# Altium PCB M2.PcbDoc
Units mil, origin at the board's own origin, x right, y up, seen from the top; angles counter-clockwise.
Board outline 3696.69 x 2256.1 mil, 2 copper layers (Top Layer, Bottom Layer); 10 components, 67 nets, 177 pads, 72 vias.
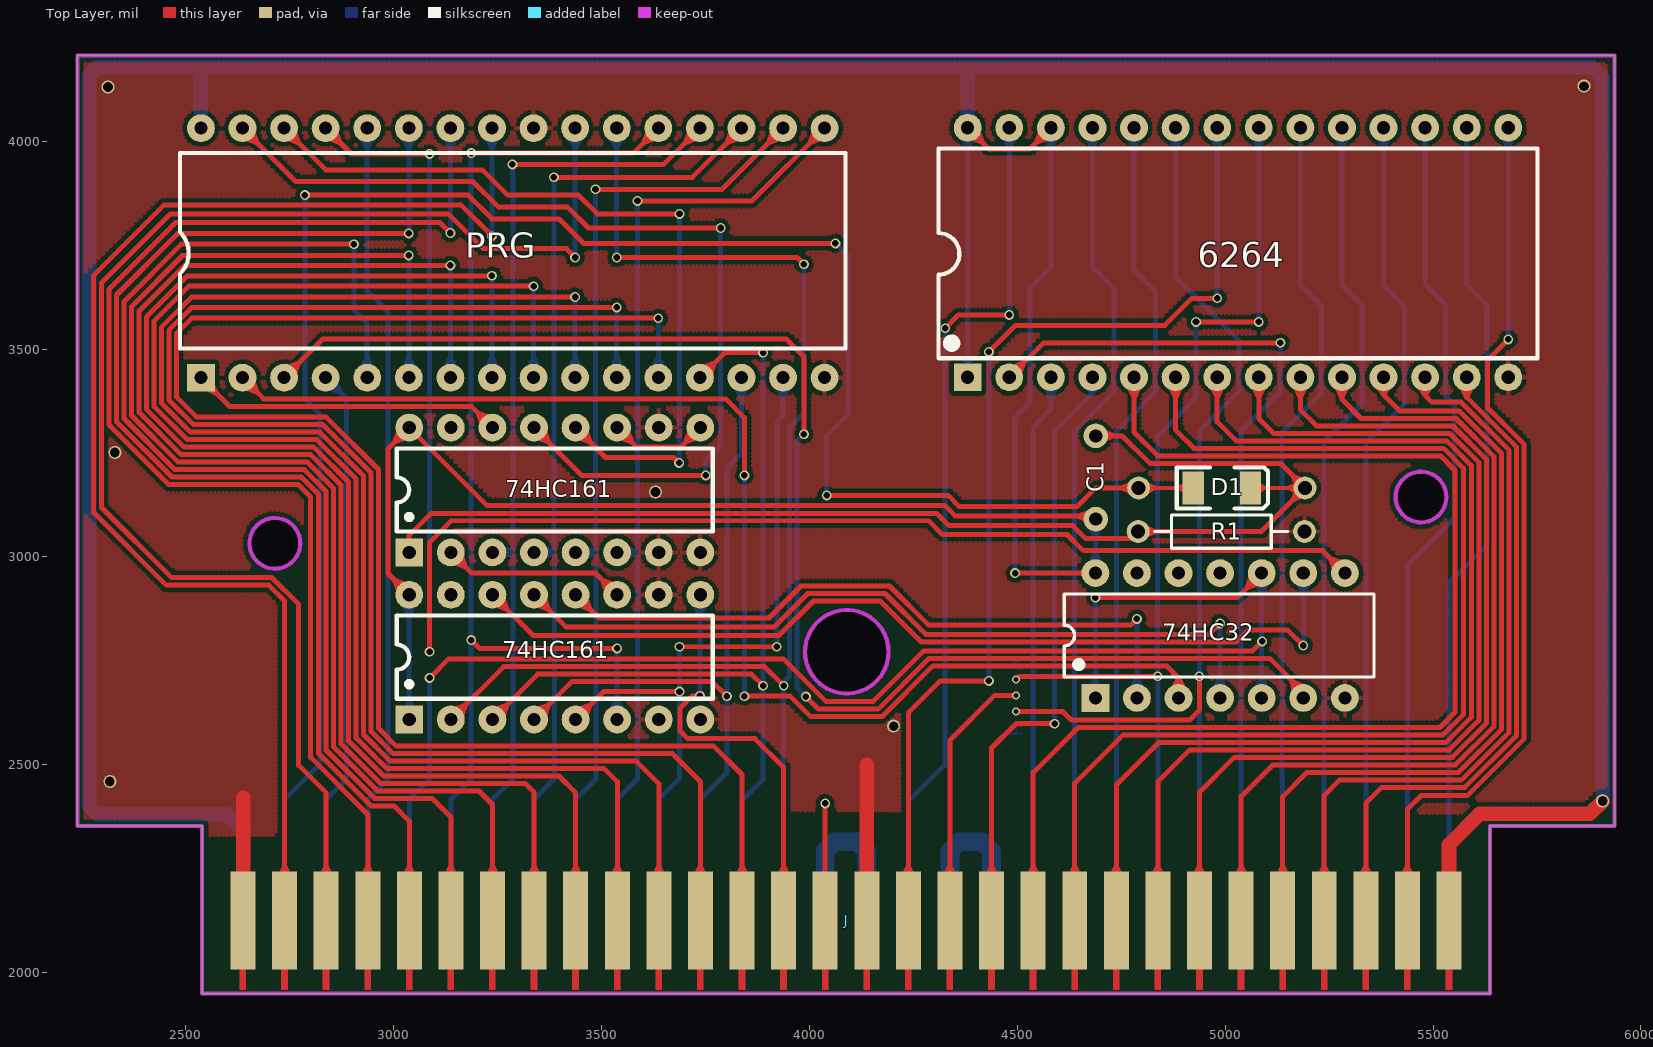
[diagram p0: Top Layer view]
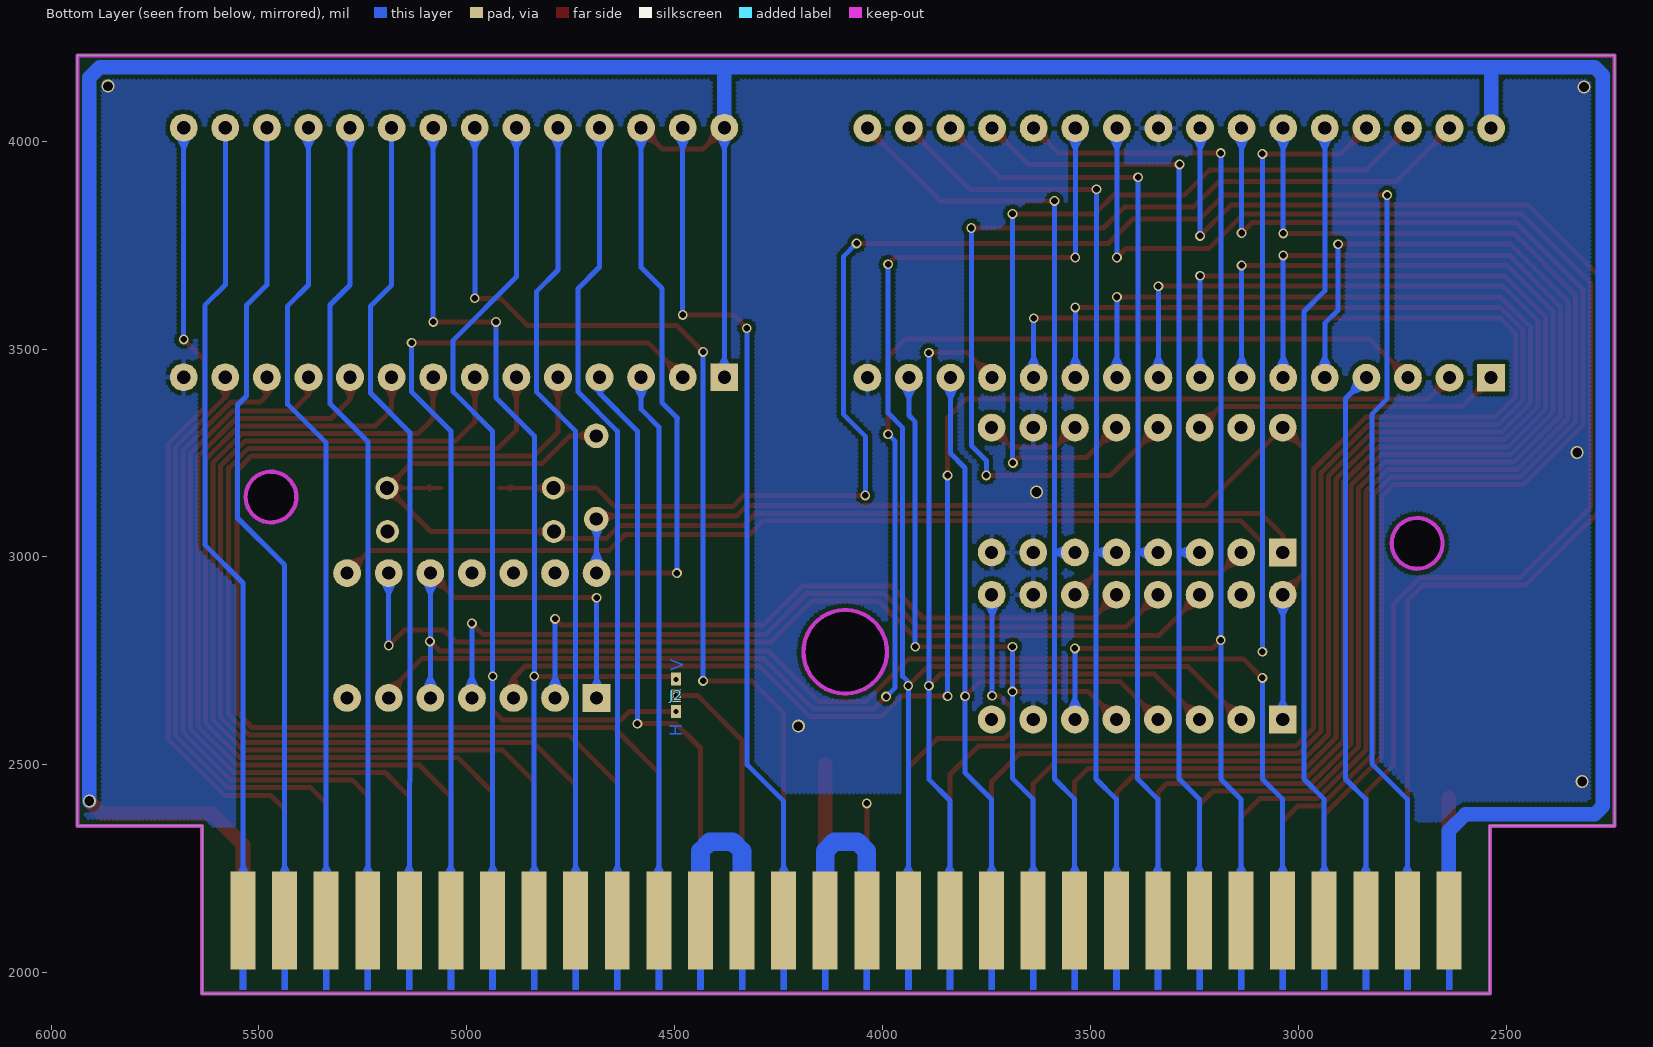
[diagram p1: Bottom Layer view, seen from below]
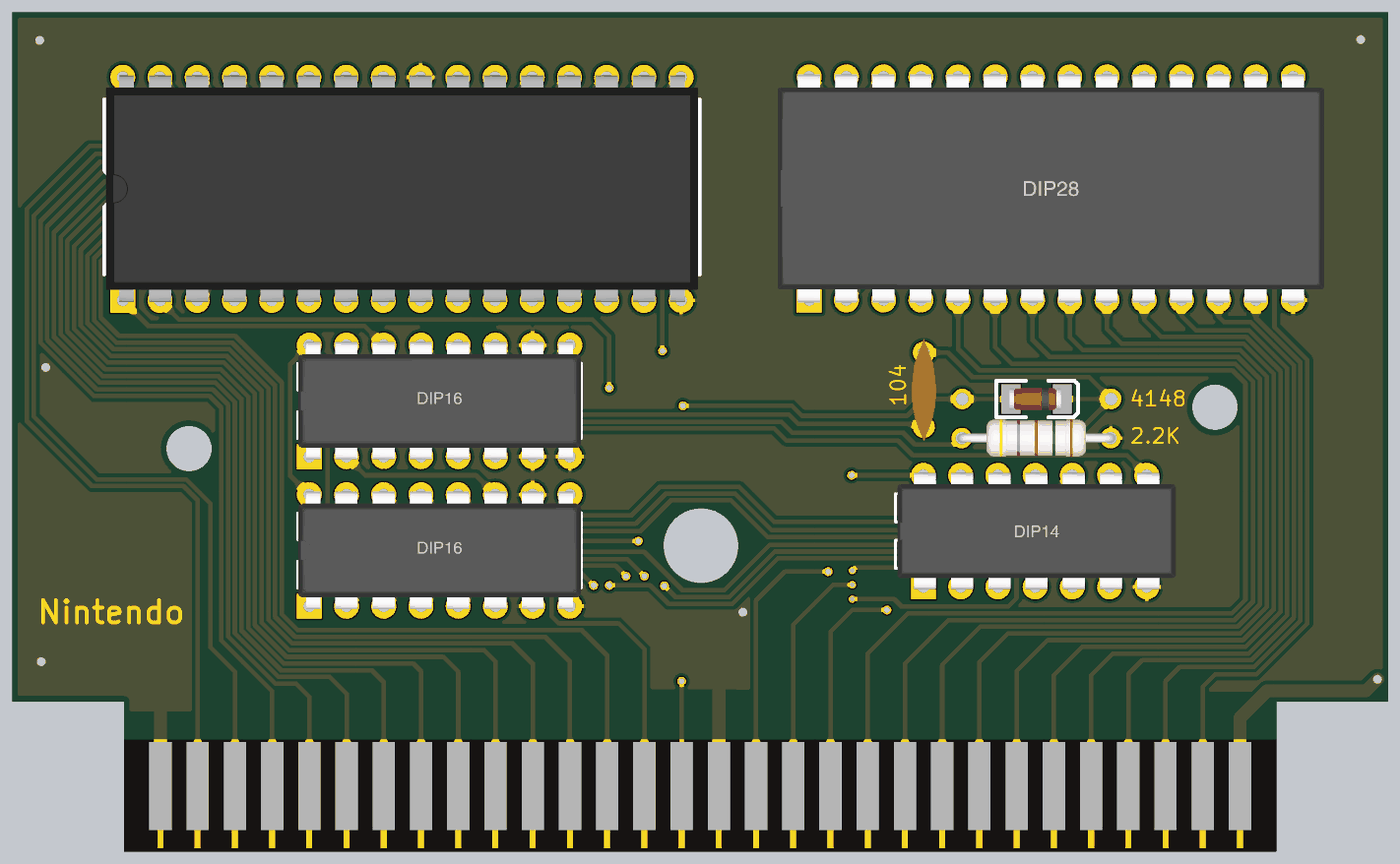
[diagram p2: 3D render of the assembled board from above, using the file's embedded part models]

## Layer stack, top to bottom
Top Solder: solder mask 0.4, Solder Resist, Dk 3.5
Top Layer: signal copper 1.4
Dielectric 1: dielectric 12.6, FR-4, Dk 4.8
Bottom Layer: signal copper 1.4
Bottom Solder: solder mask 0.4, Solder Resist, Dk 3.5

## Board outline
2540,1950 2540,2352.95 2240,2352.95 2240,4206.1 5936.69,4206.1 5936.69,2352.95 5636.69,2352.95 5636.69,1950
cut-out: 2715,2971.65 cw(c2715,3032.68) 2653.98,3032.68 cw(c2715,3032.68) 2715,3093.7 cw(c2715,3032.68) 2776.02,3032.68 cw(c2715,3032.68)
cut-out: 3989.84,2771.81 ccw(c4090.24,2771.81) 4090.24,2671.42 ccw(c4090.24,2771.81) 4190.63,2771.81 ccw(c4090.24,2771.81) 4090.24,2872.2 ccw(c4090.24,2771.81)
cut-out: 5410.04,3144.02 ccw(c5471.06,3144.02) 5471.06,3082.99 ccw(c5471.06,3144.02) 5532.09,3144.02 ccw(c5471.06,3144.02) 5471.06,3205.04 ccw(c5471.06,3144.02)

## Design rules (kind name [scope] priority, off if disabled: settings)
Clearance [All] p1: gap=6 ignorepadtopadclearanceinfootprint=FALSE except(10: Arc-Poly Track-Poly SMDPad-Poly THPad-Poly Via-Poly Fill-Poly Poly-Poly)
HoleSize [All] p1: absolutevalues=TRUE maxlimit=196.85 minlimit=1 maxpercent=80.000 minpercent=20.000
HoleToHoleClearance [All] p1: gap=1 allowstackedmicrovias=TRUE
MinimumSolderMaskSliver [All] p1: minsoldermaskwidth=1
PolygonConnect PolygonConnect_1 [IsPad] p1: connectstyle=Relief reliefconductorwidth=10 reliefentries=4 polygonreliefangle="90 Angle" airgapwidth=10
PolygonConnect [All] p2: connectstyle=Direct reliefconductorwidth=10 reliefentries=4 polygonreliefangle="90 Angle" airgapwidth=10
RoutingVias [All] p1: holewidth=15.75 width=23.62 viastyle="Through Hole" minholewidth=11.81 minwidth=19.68 maxholewidth=196.85 maxwidth=216.54
SilkToSilkClearance [All] p1: silktosilkclearance=0
SilkToSolderMaskClearance [IsPad] p1: minsilkscreentomaskgap=0 clearancetoexposedcopper=TRUE
SolderMaskExpansion [All] p1: expansion=4
Width [All] p1: maxlimit=80 minlimit=6 preferedwidth=12
25 further rules are at their usual default settings.

## Classes and differential pairs
component class M2HK: 74HC32 74HC161 6264 C1 D1 J PRG R1

## Components (designator, comment, footprint, x,y, rotation, side; value= is the part's Value field where it differs from the comment)
74HC32 "74HC32" DIP14 4988,2811 r90 top locked (schematic designator U3)
74HC161 "74LS161" DIP16 3388,2759 r90 top locked (schematic designator U4)
74HC161 "74LS161" DIP16 3388,3161 r90 top locked (schematic designator U5)
6264 "HM6264ALP-10" DIP28L 5031,3732 r90 top locked (schematic designator U2)
C1 "104" RAD-0.2 4689,3291 r270 top
D1 "4148" 4148 4923.2,3166 r0 top
J "60P" 60P-3(J)(L) 4088.38,2126 r0 top locked
J2 "3孔" 跳孔 4497,2722.12 r270 bottom
PRG "27C801" DIP32 3287,3731 r90 top locked (schematic designator U6)
R1 "2.2K" AXIAL0.4 4661,3021 r0 top

## Footprints (in the part's own frame and the unit in brackets; to place one, negate y for a bottom-side part, rotate by r counter-clockwise, add the part's x,y. Pads: shape width x height; smd on the part's side, far side on the other; paste and mask are expansions set on the pad)
60P-3(J)(L) [mil]
  rect 60x236.22 smd: 1(-1450,0) 2(-1350,0) 3(-1250,0) 4(-1150,0) 5(-1050,0) 6(-950,0) 7(-850,0) 8(-750,0) 9(-650,0) 10(-550,0) 11(-450,0) 12(-350,0) 13(-250,0) 14(-150,0) 15(-50,0) 16(50,0) 17(150,0) 18(250,0) 19(350,0) 20(450,0) 21(550,0) 22(650,0) 23(750,0) 24(850,0) 25(950,0) 26(1050,0) 27(1150,0) 28(1250,0) 29(1350,0) 30(1450,0)
  rect 60x236.22 smd far side: 31(-1450,0) 32(-1350,0) 33(-1250,0) 34(-1150,0) 35(-1050,0) 36(-950,0) 37(-850,0) 38(-750,0) 39(-650,0) 40(-550,0) 41(-450,0) 42(-350,0) 43(-250,0) 44(-150,0) 45(-50,0) 46(50,0) 47(150,0) 48(250,0) 49(350,0) 50(450,0) 51(550,0) 52(650,0) 53(750,0) 54(850,0) 55(950,0) 56(1050,0) 57(1150,0) 58(1250,0) 59(1350,0) 60(1450,0)
  Top Layer region: 1441.98,-166.91 1458.04,-166.91 1458.04,-101.91 1441.98,-101.91
  Top Layer region: 1341.98,-166.91 1358.04,-166.91 1358.04,-101.91 1341.98,-101.91
  Top Layer region: 1241.94,-166.91 1258,-166.91 1258,-101.91 1241.94,-101.91
  Top Layer region: 1141.94,-166.91 1158,-166.91 1158,-101.91 1141.94,-101.91
  Top Layer region: 1041.9,-166.91 1057.96,-166.91 1057.96,-101.91 1041.9,-101.91
  Top Layer region: 941.9,-166.91 957.96,-166.91 957.96,-101.91 941.9,-101.91
  Top Layer region: 841.9,-166.91 857.96,-166.91 857.96,-101.91 841.9,-101.91
  Top Layer region: 741.86,-166.91 757.92,-166.91 757.92,-101.91 741.86,-101.91
  Top Layer region: 641.86,-166.91 657.92,-166.91 657.92,-101.91 641.86,-101.91
  Top Layer region: 541.82,-166.91 557.88,-166.91 557.88,-101.91 541.82,-101.91
  Top Layer region: 441.82,-166.91 457.88,-166.91 457.88,-101.91 441.82,-101.91
  Top Layer region: 341.82,-166.91 357.88,-166.91 357.88,-101.91 341.82,-101.91
  Top Layer region: 241.78,-166.91 257.84,-166.91 257.84,-101.91 241.78,-101.91
  Top Layer region: 141.78,-166.91 157.84,-166.91 157.84,-101.91 141.78,-101.91
  Top Layer region: 41.74,-166.91 57.8,-166.91 57.8,-101.91 41.74,-101.91
  Top Layer region: -58.26,-166.91 -42.2,-166.91 -42.2,-101.91 -58.26,-101.91
  Top Layer region: -158.26,-166.91 -142.2,-166.91 -142.2,-101.91 -158.26,-101.91
  Top Layer region: -258.3,-166.91 -242.24,-166.91 -242.24,-101.91 -258.3,-101.91
  Top Layer region: -358.3,-166.91 -342.24,-166.91 -342.24,-101.91 -358.3,-101.91
  Top Layer region: -458.34,-166.91 -442.28,-166.91 -442.28,-101.91 -458.34,-101.91
  Top Layer region: -558.34,-166.91 -542.28,-166.91 -542.28,-101.91 -558.34,-101.91
  Top Layer region: -658.38,-166.91 -642.32,-166.91 -642.32,-101.91 -658.38,-101.91
  Top Layer region: -758.38,-166.91 -742.32,-166.91 -742.32,-101.91 -758.38,-101.91
  Top Layer region: -858.38,-166.91 -842.32,-166.91 -842.32,-101.91 -858.38,-101.91
  Top Layer region: -958.42,-166.91 -942.35,-166.91 -942.35,-101.91 -958.42,-101.91
  Top Layer region: -1058.42,-166.91 -1042.35,-166.91 -1042.35,-101.91 -1058.42,-101.91
  Top Layer region: -1158.46,-166.91 -1142.39,-166.91 -1142.39,-101.91 -1158.46,-101.91
  Top Layer region: -1258.46,-166.91 -1242.39,-166.91 -1242.39,-101.91 -1258.46,-101.91
  Top Layer region: -1358.46,-166.91 -1342.39,-166.91 -1342.39,-101.91 -1358.46,-101.91
  Top Layer region: -1458.5,-166.91 -1442.43,-166.91 -1442.43,-101.91 -1458.5,-101.91
  Bottom Layer region: -1458.5,-166.91 -1442.43,-166.91 -1442.43,-101.91 -1458.5,-101.91
  Bottom Layer region: -1358.46,-166.91 -1342.39,-166.91 -1342.39,-101.91 -1358.46,-101.91
  Bottom Layer region: -1258.46,-166.91 -1242.39,-166.91 -1242.39,-101.91 -1258.46,-101.91
  Bottom Layer region: -1158.46,-166.91 -1142.39,-166.91 -1142.39,-101.91 -1158.46,-101.91
  Bottom Layer region: -1058.42,-166.91 -1042.35,-166.91 -1042.35,-101.91 -1058.42,-101.91
  Bottom Layer region: -958.42,-166.91 -942.35,-166.91 -942.35,-101.91 -958.42,-101.91
  Bottom Layer region: -858.38,-166.91 -842.32,-166.91 -842.32,-101.91 -858.38,-101.91
  Bottom Layer region: -758.38,-166.91 -742.32,-166.91 -742.32,-101.91 -758.38,-101.91
  Bottom Layer region: -658.38,-166.91 -642.32,-166.91 -642.32,-101.91 -658.38,-101.91
  Bottom Layer region: -558.34,-166.91 -542.28,-166.91 -542.28,-101.91 -558.34,-101.91
  Bottom Layer region: -458.34,-166.91 -442.28,-166.91 -442.28,-101.91 -458.34,-101.91
  Bottom Layer region: -358.3,-166.91 -342.24,-166.91 -342.24,-101.91 -358.3,-101.91
  Bottom Layer region: -258.3,-166.91 -242.24,-166.91 -242.24,-101.91 -258.3,-101.91
  Bottom Layer region: -158.26,-166.91 -142.2,-166.91 -142.2,-101.91 -158.26,-101.91
  Bottom Layer region: -58.26,-166.91 -42.2,-166.91 -42.2,-101.91 -58.26,-101.91
  Bottom Layer region: 41.74,-166.91 57.8,-166.91 57.8,-101.91 41.74,-101.91
  Bottom Layer region: 141.78,-166.91 157.84,-166.91 157.84,-101.91 141.78,-101.91
  Bottom Layer region: 241.78,-166.91 257.84,-166.91 257.84,-101.91 241.78,-101.91
  Bottom Layer region: 341.82,-166.91 357.88,-166.91 357.88,-101.91 341.82,-101.91
  Bottom Layer region: 441.82,-166.91 457.88,-166.91 457.88,-101.91 441.82,-101.91
  Bottom Layer region: 541.82,-166.91 557.88,-166.91 557.88,-101.91 541.82,-101.91
  Bottom Layer region: 641.86,-166.91 657.92,-166.91 657.92,-101.91 641.86,-101.91
  Bottom Layer region: 741.86,-166.91 757.92,-166.91 757.92,-101.91 741.86,-101.91
  Bottom Layer region: 841.9,-166.91 857.96,-166.91 857.96,-101.91 841.9,-101.91
  Bottom Layer region: 941.9,-166.91 957.96,-166.91 957.96,-101.91 941.9,-101.91
  Bottom Layer region: 1041.9,-166.91 1057.96,-166.91 1057.96,-101.91 1041.9,-101.91
  Bottom Layer region: 1141.94,-166.91 1158,-166.91 1158,-101.91 1141.94,-101.91
  Bottom Layer region: 1241.94,-166.91 1258,-166.91 1258,-101.91 1241.94,-101.91
  Bottom Layer region: 1341.98,-166.91 1358.04,-166.91 1358.04,-101.91 1341.98,-101.91
  Bottom Layer region: 1441.98,-166.91 1458.04,-166.91 1458.04,-101.91 1441.98,-101.91
4148 [mm]
  round 1.4 hole 0.85: A(-3.329,0) K(6.831,0)
  rect 1.3x2 smd: A(0,0) K(3.5,0)
  Top Layer lines w0.254: -3.329,0 0,0 ; 3.5,0 6.831,0
  silkscreen extent -1,-1.25 4.57,1.25, body extent -0.1,-0.75 3.4,0.75, height 1.5
AXIAL0.4 [mm] "1/4W/1/2W"
  round 1.4 hole 0.85: 1(3.302,1.016) 2(13.462,1.016)
  silkscreen extent 4.32,0 12.45,2.03, body extent 3,-0.24 13.76,2.28, height 2.63
DIP14 [mm]
  rect 1.7x1.7 hole 0.8: 1(-3.81,7.62)
  round 1.7 hole 0.8: 2(-3.81,5.08) 3(-3.81,2.54) 4(-3.81,0) 5(-3.81,-2.54) 6(-3.81,-5.08) 7(-3.81,-7.62) 8(3.81,-7.62) 9(3.81,-5.08) 10(3.81,-2.54) 11(3.81,0) 12(3.81,2.54) 13(3.81,5.08) 14(3.81,7.62)
  silkscreen extent -2.54,-9.4 2.54,9.53, body extent -3.98,-9.6 3.98,9.4, height 4.1
DIP16 [mm]
  rect 1.7x1.7 hole 0.8: 1(-3.81,8.89)
  round 1.7 hole 0.8: 2(-3.81,6.35) 3(-3.81,3.81) 4(-3.81,1.27) 5(-3.81,-1.27) 6(-3.81,-3.81) 7(-3.81,-6.35) 8(-3.81,-8.89) 9(3.81,-8.89) 10(3.81,-6.35) 11(3.81,-3.81) 12(3.81,-1.27) 13(3.81,1.27) 14(3.81,3.81) 15(3.81,6.35) 16(3.81,8.89)
  silkscreen extent -2.54,-9.65 2.54,9.65, body extent -4.02,-9.65 4.02,9.65, height 4.45
DIP28L [mm]
  rect 1.7x1.7 hole 0.8: 1(-7.62,16.51)
  round 1.7 hole 0.8: 2(-7.62,13.97) 3(-7.62,11.43) 4(-7.62,8.89) 5(-7.62,6.35) 6(-7.62,3.81) 7(-7.62,1.27) 8(-7.62,-1.27) 9(-7.62,-3.81) 10(-7.62,-6.35) 11(-7.62,-8.89) 12(-7.62,-11.43) 13(-7.62,-13.97) 14(-7.62,-16.51) 15(7.62,-16.51) 16(7.62,-13.97) 17(7.62,-11.43) 18(7.62,-8.89) 19(7.62,-6.35) 20(7.62,-3.81) 21(7.62,-1.27) 22(7.62,1.27) 23(7.62,3.81) 24(7.62,6.35) 25(7.62,8.89) 26(7.62,11.43) 27(7.62,13.97) 28(7.62,16.51)
  silkscreen extent -6.46,-18.29 6.35,18.29, body extent -7.78,-18.63 7.78,18.67, height 4.7
DIP32 [mm]
  rect 1.7x1.7 hole 0.8: 1(-7.62,19.05)
  round 1.7 hole 0.8: 2(-7.62,16.51) 3(-7.62,13.97) 4(-7.62,11.43) 5(-7.62,8.89) 6(-7.62,6.35) 7(-7.62,3.81) 8(-7.62,1.27) 9(-7.62,-1.27) 10(-7.62,-3.81) 11(-7.62,-6.35) 12(-7.62,-8.89) 13(-7.62,-11.43) 14(-7.62,-13.97) 15(-7.62,-16.51) 16(-7.62,-19.05) 17(7.62,-19.05) 18(7.62,-16.51) 19(7.62,-13.97) 20(7.62,-11.43) 21(7.62,-8.89) 22(7.62,-6.35) 23(7.62,-3.81) 24(7.62,-1.27) 25(7.62,1.27) 26(7.62,3.81) 27(7.62,6.35) 28(7.62,8.89) 29(7.62,11.43) 30(7.62,13.97) 31(7.62,16.51) 32(7.62,19.05)
  silkscreen extent -5.84,-20.32 6.1,20.32, body extent -7.75,-20.21 7.75,20.19, height 5
RAD-0.2 [mm]
  round 1.5 hole 0.8: 1(0,0) 2(5.08,0)
  body extent -0.96,-0.85 6.04,0.85, height 7.06
跳孔 [mm]
  rect 0.8x0.6 smd: 1(1.4,0) 2(2.391,0) 3(0.409,0)

## Part data
74HC32: "四路2输入或门"
74HC161 74HC161: "BCD十进制计数器/ 4位二进制计数器"
6264: "8192字×8位高速CMOS静态RAM"
C1: library part CAP, "无极性电容"
D1: library part 1N4148
J2: library part 跳孔
PRG: "8兆位1M ×8紫外线可擦除CMOS EPROM"
R1: library part RES

## Via types
v1: diameter 23.62, hole 15.75, Top Layer to Bottom Layer, 62 vias
v2: diameter 31.5, hole 23.62, Top Layer to Bottom Layer, tented both sides, 7 vias
v3: diameter 19.68, hole 11.81, Top Layer to Bottom Layer, 3 vias

## Nets (pads, with @x,y where several pads share a name; then routed paths per layer and width w, separated by ;. In a path a pad name is that pad's centre, name@x,y a point inside that pad or via, vN(x,y) a via of type N, cw(c..) or ccw(c..) an arc to the next point about the centre after c; other vN are vias at no path point)
"CON 14": 74HC161.9@3738,2909 J.14 | length 1011.4
  Top Layer w12: v1(3737,2666) 3719,2666 3689,2636 3689,2582 3708,2563 3869,2563 3938.38,2493.62 J.14
  Bottom Layer w12: v1(3737,2666) 3737,2908 74HC161.9@3738,2909
"CON 18": J2.1 J.18 | length 636.6
  Top Layer w12: J.18 4338.38,2559.38 4446,2667 v3(4497,2667)
GND: 74HC32.7 74HC161.7 74HC161.8 74HC161.10 6264.14 J.1 J.16 PRG.16 PRG.24 R1.2 | length 669.8
  Top Layer w35: J.1 2638.38,2421.38 ; J.16 4138.38,2500.38
  other v2: 2318,2460 4203,2593 3630,3156 2330,3251 2314,4130 5863,4132
M2: D1.A J.32 | length 4539.2
  Top Layer w12: v1(2787,3870) 3180,3870 3237,3813 3398,3813 3457,3754 v1(4063,3754) ; v1(4042,3148) 4334,3148 4361,3121 4644,3121 4689,3166 D1.A@4792.14,3166
  Bottom Layer w12: J.32 2738.38,2417.38 2824,2503 2824,3343 2787,3380 v1(2787,3870) ; v1(4042,3148) 4042,3290 4094,3342 4094,3723 v1(4063,3754)
NetC1_1: 74HC161.1@3038,3011 C1.1 D1.K R1.1 | length 2847.8
  Top Layer w12: 74HC161.1@3038,3011 3038,3052 3091,3105 4306,3105 4336,3075 4634,3075 4665,3044 4774,3044 R1.1 5087.14,3061 5192.14,3166 5133.14,3225 4819,3225 4753,3291 C1.1
NetJ_45: J.45 J.46 | length 430
  Bottom Layer w45: J.45@4038.38,2137 4038.38,2292.84 4060.53,2315 4116.22,2315 4138.38,2292.84 J.46@4138.38,2137
NetJ_48: J.48 J.49 | length 430
  Bottom Layer w45: J.48@4338.38,2137 4338.38,2292.84 4360.53,2315 4416.22,2315 4438.38,2292.84 J.49@4438.38,2137
NetU1_36: 74HC32.8 PRG.29 | length 4010.4
  Top Layer w12: PRG.29 2899,3969 v1(3087,3969) ; v1(3087,2772) 3087,3035 3139,3087 4287,3087 4320,3054 4620,3054 4659,3015 5234,3015 74HC32.8
  Bottom Layer w12: v1(3087,2772) v1(3087,3969)
NetU3_2: 74HC32.2 74HC161.12@3438,2909 | length 1640.2
  Top Layer w12: 74HC161.12@3438,2909 3494,2853 3903,2853 3980,2930 4193,2930 4287,2836 4773,2836 v1(4788,2851)
  Bottom Layer w12: 74HC32.2 v1(4788,2851)
NetU3_4: 74HC32.4 74HC161.13@3338,2909 | length 1947.1
  Top Layer w12: 74HC161.13@3338,2909 3416,2831 3915,2831 3996,2912 4182,2912 4281,2813 4961,2813 v1(4988,2840)
  Bottom Layer w12: 74HC32.4 v1(4988,2840)
NetU3_9: 74HC32.9 74HC161.14@3238,2909 | length 2280.3
  Top Layer w12: 74HC161.14@3238,2909 3336,2811 3927,2811 4010,2894 4171,2894 4270,2795 5026,2795 5055,2824 5151,2824 v1(5188,2787) ; 74HC32.9@5187,2956 74HC32.9@5187,2969
  Bottom Layer w12: v1(5188,2787) 74HC32.9
NetU4_11: 74HC161.2@3138,3011 74HC161.11@3538,2909 | length 442.2
  Top Layer w12: 74HC161.2@3138,3011 3188,2961 3486,2961 74HC161.11@3538,2909
NetU5_9: 74HC161.9@3738,3311 74HC161.11@3538,3311 | length 238.9
  Top Layer w12: 74HC161.11@3538,3311 3585,3264 3691,3264 74HC161.9@3738,3311
"PRG A0": J.13 PRG.12 | length 3921.2
  Top Layer w12: v1(3637,3574) 2514.73,3574 2478,3537.27 2478,3385 2527,3336 2838.1,3336 2964,3210.1 2964,2588 3007,2545 3770,2545 3838.38,2476.62 J.13
  Bottom Layer w12: PRG.12 v1(3637,3574)
"PRG A1": J.12 PRG.11 | length 3792.8
  Top Layer w12: v1(3537,3600) 2515.19,3600 2460,3544.81 2460,3377.54 2519.54,3318 2830.65,3318 2946,3202.65 2946,2580.54 2999.54,2527 3671,2527 3738.38,2459.62 J.12
  Bottom Layer w12: PRG.11 v1(3537,3600)
"PRG A2": J.11 PRG.10 | length 3670
  Top Layer w12: v1(3437,3625) 2514.73,3625 2442,3552.27 2442,3370.09 2512.09,3300 2823.19,3300 2928,3195.19 2928,2573 2992,2509 3584,2509 3638.38,2454.62 J.11
  Bottom Layer w12: PRG.10 v1(3437,3625)
"PRG A3": J.10 PRG.9 | length 3558.7
  Top Layer w12: v1(3337,3651) 2508,3651 2424,3567 2424,3362.63 2504.63,3282 2815.73,3282 2910,3187.73 2910,2565.54 2984.54,2491 3507,2491 3538.38,2459.62 J.10
  Bottom Layer w12: PRG.9 v1(3337,3651)
"PRG A4": J.9 PRG.8 | length 3424.4
  Top Layer w12: v1(3237,3676) 2505,3676 2406,3577 2406,3355.18 2497.18,3264 2808.28,3264 2892,3180.28 2892,2558.09 2977.09,2473 3398,2473 3438.38,2432.62 J.9
  Bottom Layer w12: PRG.8 v1(3237,3676)
"PRG A5": J.8 PRG.7 | length 3308.9
  Top Layer w12: v1(3137,3701) 2498,3701 2388,3591 2388,3347.72 2489.72,3246 2800.82,3246 2874,3172.82 2874,2550.63 2969.63,2455 3317,2455 3338.38,2433.62 J.8
  Bottom Layer w12: PRG.7 v1(3137,3701)
"PRG A6": J.7 PRG.6 | length 3172.7
  Top Layer w12: v1(3037,3725) 2493,3725 2370,3602 2370,3340.27 2482.27,3228 2793.37,3228 2856,3165.37 2856,2543.18 2962.18,2437 3206,2437 3238.38,2404.62 J.7
  Bottom Layer w12: PRG.6 v1(3037,3725)
"PRG A7": J.6 PRG.5 | length 3021.4
  Top Layer w12: v1(2905,3752) 2490,3752 2352,3614 2352,3332.81 2474.81,3210 2785.91,3210 2838,3157.91 2838,2535.72 2954.72,2419 3093,2419 3138.38,2373.62 J.6
  Bottom Layer w12: v1(2905,3752) 2905,3594 2937,3562 PRG.5
"PRG A8": J.5 PRG.27 | length 3027.5
  Top Layer w12: v1(3037,3778) 2482,3778 2334,3630 2334,3325.35 2467.35,3192 2778.46,3192 2820,3150.46 2820,2528 2947,2401 3002,2401 3038.38,2364.62 J.5
  Bottom Layer w12: v1(3037,3778) PRG.27
"PRG A9": J.4 PRG.26 | length 3107.7
  Top Layer w12: J.4 2938.38,2380.62 2801,2518 2801,3144 2771,3174 2459.9,3174 2316,3317.9 2316,3644 2476,3804 3112,3804 v1(3137,3779)
  Bottom Layer w12: v1(3137,3779) PRG.26
"PRG A10": J.3 PRG.23 | length 3466.3
  Top Layer w12: J.3 2838.38,2432.62 2772,2499 2772,2886 2708,2950 2467,2950 2298,3119 2298,3659 2464,3825 3132,3825 3215,3742 3415,3742 v1(3437,3720)
  Bottom Layer w12: v1@3437,3714 v1(3437,3720) PRG.23
"PRG A11": J.2 PRG.25 | length 3203.4
  Top Layer w12: J.2 2738.38,2894.17 2700.54,2932 2454,2932 2279,3107 2279,3677 2448,3846 3163,3846 v1(3237,3772)
  Bottom Layer w12: v1(3237,3772) PRG.25
"PRG A12": J.33 PRG.4 | length 1345.9
  Bottom Layer w12: PRG.4 2887,3381 2887,2466 2838.38,2417.38 J.33
"PRG A13": J.34 PRG.28 | length 1945.9
  Bottom Layer w12: PRG.28 2937,3640 2987,3590 2987,2466 2938.38,2417.38 J.34
"PRG A14": 74HC32.1 74HC32.5 74HC32.10 J.35 | length 3692.5
  Top Layer w12: v1(3087,2709) 3133,2755 3937.43,2755 4040.56,2651.87 4152.87,2651.87 4275,2774 5066,2774 v1(5089,2797) ; v1(4688,2902) 5029,2902 74HC32.10
  Bottom Layer w12: J.35 3038.38,2417.38 3087,2466 v1(3087,2709) ; 74HC32.1 v1(4688,2902) ; 74HC32.5 74HC32.10
"PRG A15": 74HC32.6 PRG.3 | length 3446.5
  Top Layer w12: PRG.3 2830,3524 3945,3524 3987,3482 v1(3987,3295) ; v1(3992,2664) 4022.25,2633.75 4165.75,2633.75 4288,2756 5107,2756 5188,2675 74HC32.6
  Bottom Layer w12: v1(3987,3295) 3970.3,3278.3 3970.3,2685.7 v1(3992,2664)
"PRG A16": 74HC32.3 PRG.2 | length 3091.8
  Top Layer w12: PRG.2 2688,3380 3799,3380 3844,3335 v1(3844,3196) ; v1(3844,2665) 3954,2665 4003.25,2615.75 4174.75,2615.75 4297,2738 4859,2738 4888,2709 74HC32.3
  Bottom Layer w12: v1(3844,2665) v1(3844,3196)
"PRG A17": 74HC161.12@3438,3311 PRG.30 | length 1920
  Top Layer w12: PRG.30 2837,3931 3214,3931 3275,3870 3445,3870 3490,3825 v1(3688,3825) ; 74HC161.12@3438,3311 3510,3239 3674,3239 v1(3687,3226)
  Bottom Layer w12: v1(3687,3226) 3688,3227 v1(3688,3825)
"PRG A18": 74HC161.13@3338,3311 PRG.31 | length 2320
  Top Layer w12: PRG.31 2765,3903 3191,3903 3253,3841 3419,3841 3469,3791 v1(3787,3791) ; 74HC161.13@3338,3311 3453,3196 v1(3751,3196)
  Bottom Layer w12: v1(3751,3196) 3751,3232 3787,3268 v1(3787,3791)
"PRG A19": 74HC161.14@3238,3311 PRG.1 | length 750.7
  Top Layer w12: PRG.1 2606,3362 3187,3362 74HC161.14@3238,3311
"PRG CE": 74HC161.2@3138,2609 J.44 PRG.22 | length 3237.9
  Top Layer w12: 74HC161.2@3138,2609 3265,2736 3892.5,2736 v1(3938.5,2690) ; v1(3537,3720) 3971,3720 v1(3987,3704)
  Bottom Layer w12: v1(3537,3720) PRG.22 ; J.44 v1@3938.38,2699.5 ; v1@3938.5,2699.5 3952,2713 3952,3311 3987,3346 v1(3987,3704)
"PRG D0": 74HC161.3@3238,2609 J.43 PRG.13 | length 2271
  Top Layer w12: 74HC161.3@3238,2609 3347,2718 3861,2718 v1(3889,2690) ; PRG.13 3798,3492 v1@3889,3492
  Bottom Layer w12: J.43 3838.38,2414.38 3889,2465 v1(3889,2690) v1(3889,3491)
"PRG D1": 74HC161.4@3338,2609 J.42 PRG.14 | length 1862
  Top Layer w12: 74HC161.4@3338,2609 3429,2700 3767,2700 v1(3802,2665)
  Bottom Layer w12: J.42 3738.38,2417.38 3802,2481 v1(3802,2665) 3802,3214 3837,3249 PRG.14
"PRG D2": 74HC161.5@3438,2609 J.41 PRG.15 | length 1843.9
  Top Layer w12: 74HC161.5@3438,2609 3505,2676 v1(3688,2676) ; v1(3688,2784) v1(3922,2784)
  Bottom Layer w12: J.41 3638.38,2417.38 3688.46,2467.46 3688.46,2627.83 3688,2628.3 v1(3688,2676) v1(3688,2784) ; v1(3922,2784) 3922,3325 3937,3340 PRG.15
"PRG D3": 74HC161.6@3538,3011 J.40 PRG.17 | length 2322.5
  Top Layer w12: v1(3587,3856) 3862,3856 PRG.17
  Bottom Layer w12: 74HC161.6@3538,3011 3585,3011 3587,3013 ; J.40 3538.38,2417.38 3587,2466 3587,3013 ; v1(3587,3856) 3587,3013
"PRG D4": 74HC161.5@3438,3011 J.39 PRG.18 | length 2338.9
  Top Layer w12: v1(3486,3884) 3790,3884 PRG.18
  Bottom Layer w12: 74HC161.5@3438,3011 3486.5,3011 ; J.39 3438.38,2417.38 3487,2466 3487,3010.5 3486.5,3011 ; v1(3486,3884) 3486.5,3883.5 3486.5,3011
"PRG D5": 74HC161.4@3338,3011 J.38 PRG.19 | length 2357.4
  Top Layer w12: v1(3386,3913) 3719,3913 PRG.19
  Bottom Layer w12: 74HC161.4@3338,3011 3386,3011 ; J.38 3338.38,2417.38 3387,2466 3387,3012 3386,3011 ; v1(3386,3913) 3386,3011
"PRG D6": 74HC161.3@3238,3011 J.37 PRG.20 | length 2374.8
  Top Layer w12: v1(3286,3944) 3650,3944 PRG.20
  Bottom Layer w12: 74HC161.3@3238,3011 3286.5,3011 3287,3010.5 ; J.37 3238.38,2417.38 3287,2466 3287,3010.5 ; v1(3286,3944) 3287,3943 3287,3010.5
"PRG D7": 74HC161.6@3538,2609 J.36 PRG.21 | length 2870.3
  Top Layer w12: v1(3187,2800) 3207,2780 v1(3538,2780) ; v1(3187,3971) 3577,3971 PRG.21
  Bottom Layer w12: J.36 3138.38,2417.38 3187,2466 v1(3187,2800) v1(3187,3971) ; 74HC161.6@3538,2609 v1(3538,2780)
"RAM A0": 6264.10 J.25 | length 2100.6
  Top Layer w12: J.25 5038.38,2423.38 5115,2500 5553.98,2500 5647,2593.02 5647,3241.28 5555.28,3333 5327,3333 5281,3379 6264.10
"RAM A1": 6264.9 J.24 | length 2276.9
  Top Layer w12: J.24 4938.38,2434.38 5022,2518 5546.53,2518 5629,2600.47 5629,3233.82 5547.82,3315 5220,3315 5181,3354 6264.9
"RAM A2": 6264.8 J.23 | length 2458.3
  Top Layer w12: J.23 4838.38,2459.38 4915,2536 5539.07,2536 5610,2606.93 5610,3227.37 5540.37,3297 5117,3297 5081,3333 6264.8
"RAM A3": 6264.7 J.22 | length 2613.6
  Top Layer w12: J.22 4738.38,2451.38 4841,2554 5531.62,2554 5592,2614.38 5592,3219.91 5532.91,3279 5027,3279 4981,3325 6264.7
"RAM A4": 6264.6 J.21 | length 2782.1
  Top Layer w12: J.21 4638.38,2455.38 4755,2572 5524.16,2572 5573,2620.84 5573,3213.46 5525.46,3261 4925,3261 4881,3305 6264.6
"RAM A5": 6264.5 J.20 | length 2953.8
  Top Layer w12: J.20 4538.38,2481.38 4647,2590 5516.71,2590 5553,2626.29 5553,3208 5518,3243 4838,3243 4781,3300 6264.5
"RAM A6": 6264.4 J.19 | length 1461
  Top Layer w12: J.19 4438.38,2540.38 4497,2599 v1(4590,2599)
  Bottom Layer w12: v1(4590,2599) 4590,3303 4681,3394 6264.4
"RAM A7": 6264.3 J.50 | length 1323.7
  Bottom Layer w12: J.50 4538.38,3312.38 4581,3355 6264.3
"RAM A8": 6264.25 J.51 | length 1966.7
  Bottom Layer w12: J.51 4638.38,3302.38 4733,3397 4733,3645 4681,3697 6264.25
"RAM A9": 6264.24 J.52 | length 1966.7
  Bottom Layer w12: J.52 4738.38,3302.38 4833,3397 4833,3638 4781,3690 6264.24
"RAM A10": 6264.21 J2.3 J.53 | length 2439.4
  Top Layer w12: v3(4497,2705) 4505,2713 v1(4838,2713) ; v1(4930,3565) v1(5081,3565)
  Bottom Layer w12: v1@4838,2722 4838,3291 4930,3383 v1(4930,3565) ; J.53 v1@4838.38,2722 ; v1(5081,3565) 6264.21
"RAM A11": 6264.23 J2.2 J.54 | length 2549
  Top Layer w12: v3(4497,2628) 4610,2628 4630,2608 4915,2608 4938,2631 v1(4938,2713)
  Bottom Layer w12: 6264.23 4881,3673 5033,3521 5033,3397 4938.38,3302.38 J.54
"RAM A12": 6264.2 J.55 | length 2114.6
  Top Layer w12: 6264.2 4564,3515 v1(5133,3515)
  Bottom Layer w12: J.55 5038.38,3302.38 5133,3397 v1(5133,3515)
"RAM CE": 6264.20 J.56 | length 1966.7
  Bottom Layer w12: J.56 5138.38,2459.38 5137.38,2460.38 5137.38,3299.38 5232,3394 5232,3603 5181,3654 6264.20
"RAM D0": 6264.11 J.26 | length 1938.9
  Top Layer w12: J.26 5138.38,2423.38 5197,2482 5561.44,2482 5665,2585.56 5665,3248.73 5562.73,3351 5420,3351 5381,3390 6264.11
"RAM D1": 6264.12 J.27 | length 1786.5
  Top Layer w12: J.27 5238.38,2426.38 5276,2464 5568.9,2464 5683,2578.1 5683,3256.19 5566.19,3373 5496,3373 5481,3388 6264.12
"RAM D2": 6264.13 J.28 | length 1622.7
  Top Layer w12: J.28 5338.38,2407.38 5377,2446 5576.35,2446 5701,2570.65 5701,3263.65 5581,3383.65 6264.13
"RAM D3": 6264.15 J.29 | length 2144.4
  Top Layer w12: J.29 5438.38,2393.38 5471,2426 5582,2426 5719,2563 5719,3271.1 5631,3359.1 5631,3473 v1(5681,3523)
  Bottom Layer w12: v1(5681,3523) 6264.15
"RAM D4": 6264.16 J.60 | length 1964.2
  Bottom Layer w12: J.60 5538.38,2937.38 5630,3029 5630,3605 5581,3654 6264.16
"RAM D5": 6264.17 J.59 | length 1982.3
  Bottom Layer w12: J.59 5438.38,2980.38 5551.75,3093.75 5551.75,3365.25 5530,3387 5530,3605 5481,3654 6264.17
"RAM D6": 6264.18 J.58 | length 1965.1
  Bottom Layer w12: J.58 5338.38,3274.38 5431,3367 5431,3604 5381,3654 6264.18
"RAM D7": 6264.19 J.57 | length 1963.4
  Bottom Layer w12: J.57 5238.38,3277.38 5329,3368 5329,3606 5281,3654 6264.19
"RAM OE": 6264.22 J.17 | length 2528.2
  Top Layer w12: J.17 4238.38,2625.38 4315,2702 v1(4432,2702) ; v1(4432,3493) 4496,3557 4855,3557 4920,3622 v1(4981,3622)
  Bottom Layer w12: v1(4432,2702) v1(4432,3493) ; v1(4981,3622) 6264.22
"RAM WE": 6264.27 J.47 | length 2077.5
  Top Layer w12: v1(4327,3550) 4359,3582 v1(4481,3582)
  Bottom Layer w12: J.47 4238.38,2412.38 4326,2500 v1@4326,3550 ; v1(4481,3582) 6264.27
VCC: 74HC32.14 74HC161.1@3038,2609 74HC161.16 6264.1 6264.26 6264.28 C1.2 J.30 J.31 PRG.32 | length 13407.6
  Top Layer w12: 74HC161.16@3038,2909 2987,2960 2987,3260 3038,3311 3224.81,3124.19 4325.81,3124.19 4351,3099 4681,3099 C1.2 ; 6264.28 4432,3981 4530,3981 6264.26 ; v1(4495,2961) 74HC32.14 74HC32.14@4700,2961
  Top Layer w35: J.30 5538.38,2308.38 5612,2382 5877.17,2382 v2(5908,2412.83)
  Bottom Layer w12: 74HC161.1@3038,2609 74HC161.16@3038,2909 ; 6264.1 6264.28 ; v1(4495,2961) 4495,3333 4494,3334 4531,3371 4531,3646 4581,3696 6264.26 ; 74HC32.14 4688,3076 C1.2@4689,3077
  Bottom Layer w35: PRG.32 2537,4174.6 ; J.31 2638.38,2341.62 2598.55,2381.45 2287.55,2381.45 2268.5,2400.5 2268.5,4158.5 2287.6,4177.6 4380,4177.6 ; 6264.28 4381,4176.6 4380,4177.6 ; v2(5908,2412.83) 5908.19,2413.02 5908.19,4151.81 5882.4,4177.6 4380,4177.6
pads on no net: 74HC32.11 74HC32.12 74HC32.13 74HC161.15 J.15
copper on no net: | length 281.4
  Top Layer w12: 4038.38,2126 v1(4038.38,2407.38)

## Polygon pours and split planes (outlines as drawn)
GND on Top Layer "Top Layer-No Net" (hatched 90Degree grid 10 track 10, remove dead copper, pour order 0): 2233,4210 2236.9,4206.1 5936.69,4206.1 5936.69,3420.69 5936.69,2382.03 2248.85,2399
GND on Top Layer "Top Layer-No Net" (hatched 90Degree grid 10 track 10, remove dead copper, pour order 10): 2237,2455 2735,2455 2740,2450 2738.38,2448.38 2738.38,2331 2551,2331 2551,2352.95 2241.33,2352.95
GND on Bottom Layer "Top Layer-No Net" (hatched 90Degree grid 10 track 10, pour order 2): 3544,3436 3544,2615 3538,2609 3801,2609 3802,2608 3802,3214 3837,3249 3837,3431
GND on Bottom Layer "Top Layer-No Net" (hatched 90Degree grid 10 track 10, remove dead copper, pour order 4): 5936.69,2352.95 5538.73,2352.95 5538.38,2937.38 5630,3029 5630,3521 5632,3523 5681,3523 5681,4041 5679,4039 4372,4039 4372,4171 4402,4201 5936.69,4201
GND on Bottom Layer "Top Layer-No Net" (hatched 90Degree grid 10 track 10, remove dead copper, pour order 6): 3938.38,2434 4265,2434 4265,2439 4326,2500 4326,3485 4381,3430 4381,4209 4375,4215 4369,4209 2527,4209 2527,4034 2540,4021 2550,4031 3237,4031 3237,3993 3286,3944 3289,3947 3440,3947 3440,4028 3437,4031 3537,4031 3537,3856 3540,3853 3543,3856 3657,3856 3722,3791 3787,3791 3787,3438 3794,3431 3946,3431 3949,3434 3985,3434 3985,3297 3987,3295 3938.5,3246.5 3938.5,2690
GND on Bottom Layer "Top Layer-No Net" (hatched 90Degree grid 10 track 10, remove dead copper, pour order 8): 2240,4206.1 2240,2384.33 2259.33,2365 2740,2365 2740,2419 2824,2503 2824,3343 2787,3380 2837,3430 2837,3431 2937,3431 2937,3562 2905,3594 2905,3752 2936,3752 2937,3751 2937,4031 2537,4031 2537,4205

## Keep-outs
Keep-Out Layer:
  circle w10: c5471.06,3144.02 r61.02
  circle w10: c4090.24,2771.81 r100.39
  circle w10: c2715,3032.68 r61.02
  lines w10: 2240,2352.95 2240,4206.1 5936.69,4206.1 5936.69,2352.95 5636.69,2352.95 5636.69,1950 2540,1950 2540,2352.95 2240,2352.95

## Other copper
Bottom Layer:
  text "V" at 4480,2754 h30 r270
  text "H" at 4482,2599 h30 r270

## Silkscreen, mask and mechanical layers (free items; w line width, h text height)
Top Solder:
  rectangle: 2247,1899 5923,2251
  text "Nintendo" at 2302,2565 h60
Bottom Solder:
  rectangle: 2247,1899 5923,2251